# Altium PCB MQTT_SelService_V2.PcbDoc
Units mil, origin at the board's own origin, x right, y up, seen from the top; angles counter-clockwise.
Board outline 4825 x 3045 mil, 2 copper layers (Top Layer, Bottom Layer); 115 components, 94 nets, 385 pads, 190 vias.
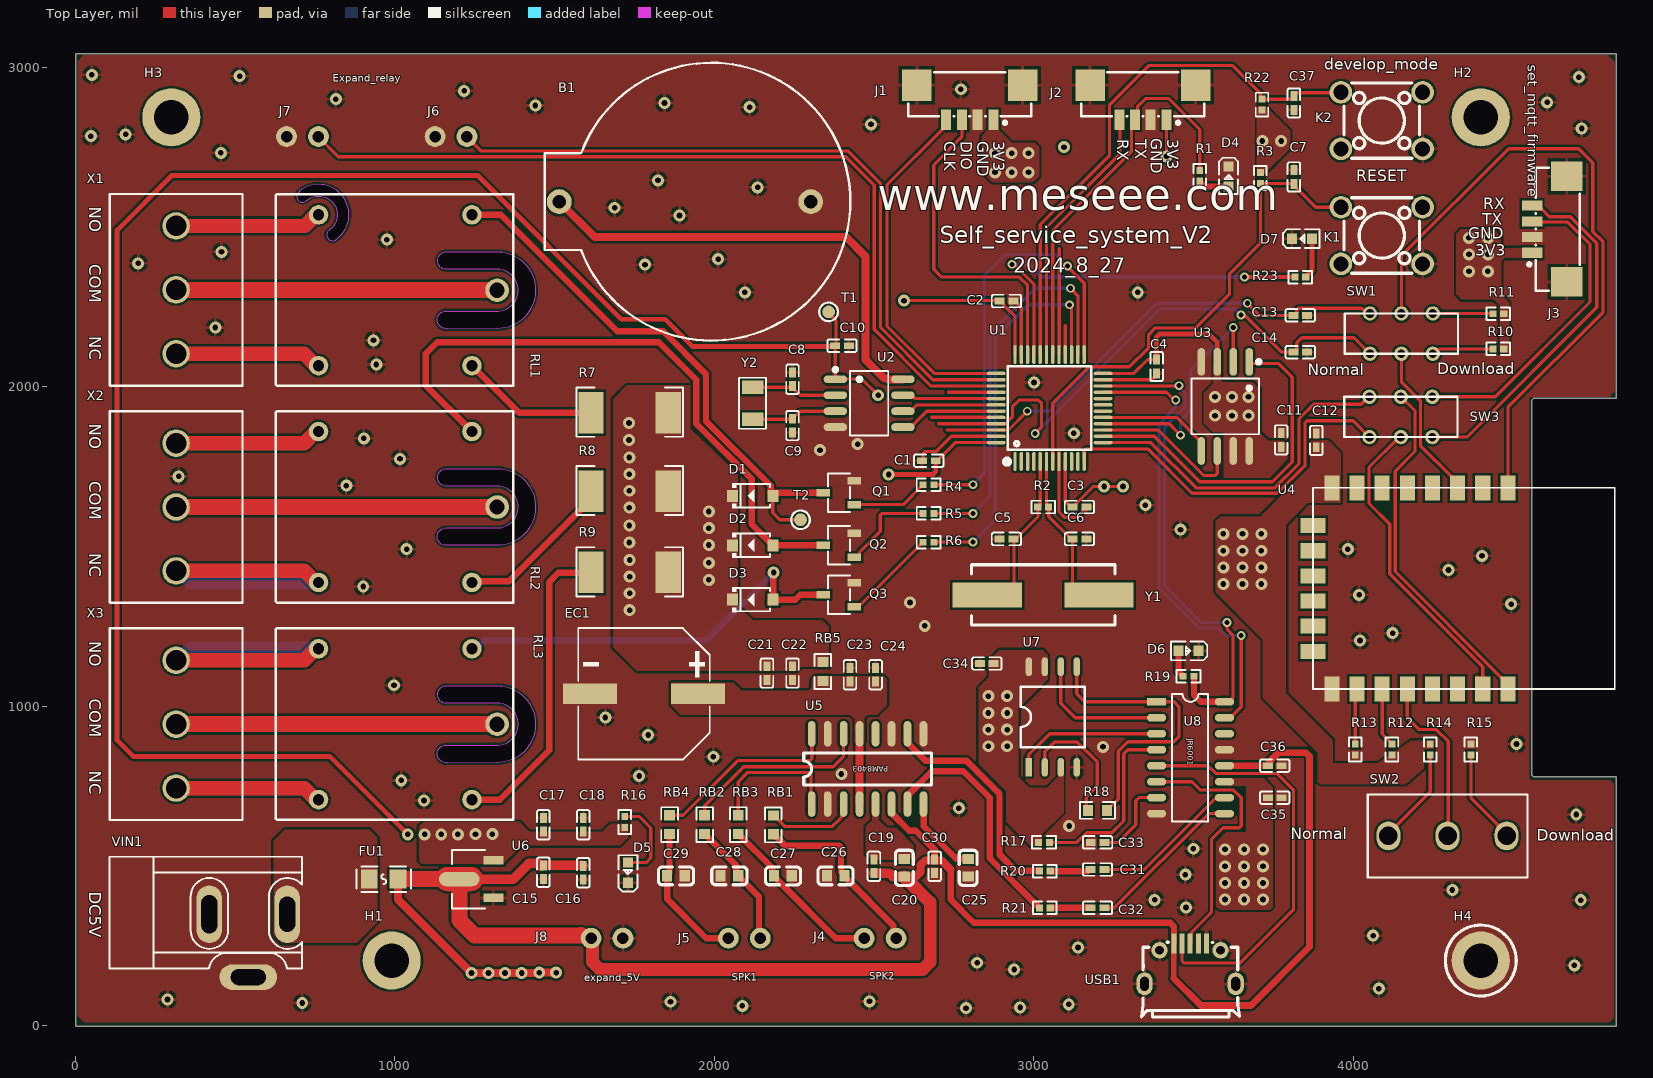
[diagram p0: Top Layer view]
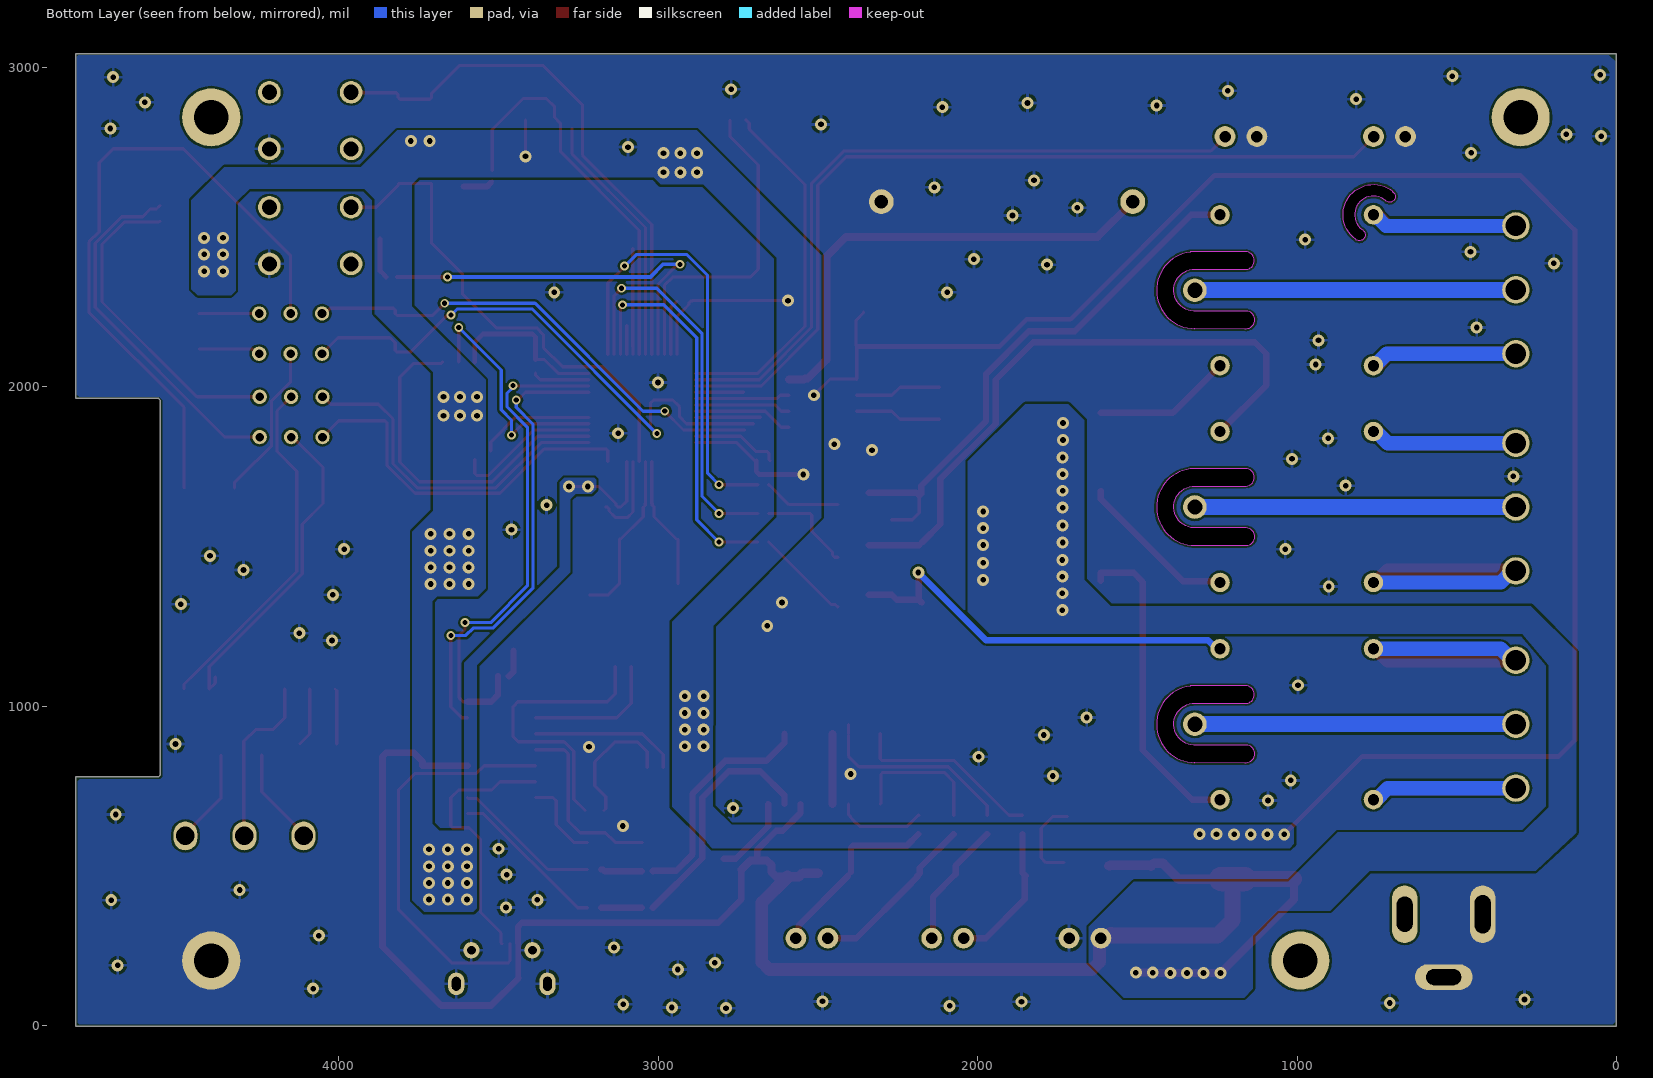
[diagram p1: Bottom Layer view, seen from below]

## Layer stack, top to bottom
Top Solder: solder mask 0.4, Solder Resist, Dk 3.5
Top Layer: signal copper 1.4
Dielectric 1: dielectric 12.6, FR-4, Dk 4.8
Bottom Layer: signal copper 1.4
Bottom Solder: solder mask 0.4, Solder Resist, Dk 3.5

## Board outline
0,-1 0,3044 4825,3044 4825,1964 4565,1964 4560,1959 4560,784 4565,779 4825,779 4825,-1
cut-out: 816.73,2461.83 ccw(c761,2539) 700.67,2612.63 701.55,2611.55 ccw(c710,2596) 722.6,2583.57 cw(c761,2539) 797.99,2493.25 798.07,2493.04 ccw(c805,2476)
cut-out: 1163.23,823.77 cw(c1160,851) 1158.99,878.4 1159.19,878.42 1314.96,878.42 ccw(c1320.06,944) 1319.99,1009.77 1164.23,1009.77 cw(c1161,1037) 1159.99,1064.4 1159.99,1064 1335,1064 1334.91,1063.29 cw(c1320.06,944) 1320,823.79 1320,824.2
cut-out: 1163.23,2182.55 cw(c1160,2209.78) 1158.99,2237.18 1159.19,2237.2 1314.96,2237.2 ccw(c1320.06,2302.78) 1319.99,2368.55 1164.23,2368.55 cw(c1161,2395.78) 1159.99,2423.18 1159.99,2422.78 1335,2422.78 1334.91,2422.07 cw(c1320.06,2302.78) 1320,2182.57 1320,2182.98
cut-out: 1163.23,1503.77 cw(c1160,1531) 1158.99,1558.4 1159.19,1558.42 1314.96,1558.42 ccw(c1320.06,1624) 1319.99,1689.77 1164.23,1689.77 cw(c1161,1717) 1159.99,1744.4 1159.99,1744 1335,1744 1334.91,1743.29 cw(c1320.06,1624) 1320,1503.79 1320,1504.2

## Design rules (kind name [scope] priority, off if disabled: settings)
Clearance [All] p1: gap=7 ignorepadtopadclearanceinfootprint=FALSE except(0: Arc-Hole Track-Hole SMDPad-Hole THPad-Hole Via-Hole Fill-Hole Poly-Hole Region-Hole Text-Hole)
PolygonConnect [All] p1: connectstyle=Relief reliefconductorwidth=10 reliefentries=4 polygonreliefangle="90 Angle" airgapwidth=10
RoutingVias [All] p1: holewidth=28 width=50 viastyle="Through Hole" minholewidth=28 minwidth=50 maxholewidth=28 maxwidth=50
SolderMaskExpansion [All] p1: expansion=4 istentingtop=FALSE
Width [All] p1: maxlimit=60 minlimit=10 preferedwidth=10 minimp=50.000000 maximp=50.000000 favimp=50.000000
30 further rules are at their usual default settings.

## Components (designator, comment, footprint, x,y, rotation, side; value= is the part's Value field where it differs from the comment)
B1 "Battery" BATTERY 1991,2580 r180 top
C1 "104,0402" C0402 2672,1769 r0 top value=104
C2 "104,0402" C0402 2915,2269 r180 top value=104
C3 "104,0402" C0402 3143.54,1624 r180 top value=104
C4 "104,0402" C0402 3385,2064 r90 top value=104
C5 "20pF,0402" C0402 2915,1524 r0 top value=104
C6 "20pF,0402" C0402 3143.54,1524 r180 top value=104
C7 "104,0402" C0402 3815,2657.54 r270 top value=104
C8 "6pF,0402" C0402 2245,2024 r270 top value=104
C9 "6pF,0402" C0402 2245,1879 r90 top value=104
C10 "104,0402" C0402 2400,2129 r180 top value=104
C11 "104,0402" C0402 3775,1834 r270 top value=104
C12 "104,0402" C0402 3885,1832.54 r270 top value=104
C13 "104,0402" C0402 3835,2224 r180 top value=104
C14 "104,0402" C0402 3835,2109 r180 top value=104
C15 "104,0402" C0402 1465,480.46 r90 top value=104
C16 "2.2uF,0402" C0402 1590,479 r90 top value=104
C17 "104,0402" C0402 1465,629 r270 top value=104
C18 "2.2uF,0402" C0402 1590,629 r270 top value=104
C19 "47k,0402" C0402 2500,499 r270 top value=104
C20 "1nF,0603" C0603 2595,494 r270 top value=104
C21 "104,0402" C0402 2165,1104 r90 top value=104
C22 "106,0402" C0402 2245,1104 r90 top value=104
C23 "104,0402" C0402 2425,1099 r270 top value=104
C24 "104,0402" C0402 2505,1099 r270 top value=104
C25 "105,0603" C0603 2795,494.71 r90 top value=104
C26 "200pF,0603" C0603 2380,469 r0 top value=104
C27 "200pF,0603" C0603 2215,469 r180 top value=104
C28 "200pF,0603" C0603 2047.56,469 r0 top value=104
C29 "200pF,0603" C0603 1880,469 r180 top value=104
C30 "104,0402" C0402 2690,499 r90 top value=104
C31 "470nF,0402" C0402 3200,489 r180 top value=104
C32 "470nF,0402" C0402 3200,369 r0 top value=104
C33 "104,0402" C0402 3200.24,573.84 r180 top value=104
C34 "104,0402" C0402 2853.54,1134 r0 top value=104
C35 "104,0402" C0402 3755,714 r180 top value=104
C36 "104,0402" C0402 3755,814 r180 top value=104
C37 "104,0402" C0402 3815,2889 r90 top value=104
D1 "1N4148" 1N4148 2120,1659 r180 top
D2 "1N4148" 1N4148 2120,1504 r180 top
D3 "1N4148" 1N4148 2120,1334 r180 top
D4 "LED" LED0603 3610,2659 r270 top
D5 "LED" LED0603 1730,479 r90 top
D6 "LED" LED0603 3485,1174 r180 top
D7 "LED" LED0603 3840,2464 r0 top
EC1 "EC1000uF" EC1000uF 1780,1039 r180 top
FU1 "PPTC" F0805 965,459 r180 top
H1 "HOLE_M2.5" hole 990,204 r0 top
H2 "HOLE_M2.5" hole 4400,2844 r0 top
H3 "HOLE_M2.5" hole 300,2844 r0 top
H4 "HOLE_M2.5" hole 4400,204 r0 top
J1 "Conn_1.25mm_4Pin_PLT" CONN-SMD_4P-P1.25_HCTL_HC-1.25-4PLT 2800,2890.34 r180 top
J2 "Conn_1.25mm_4Pin_PLT_1" CONN-SMD_4P-P1.25_HCTL_HC-1.25-4PLT 3342,2890.34 r180 top
J3 "Conn_1.25mm_4Pin_PLT_2" CONN-SMD_4P-P1.25_HCTL_HC-1.25-4PLT 4615,2494 r90 top
J4 "Speaker-OUTL" XH_2.54MM_2PIN_直插 2520,274 r180 top
J5 "Speaker-OUTR" XH_2.54MM_2PIN_直插 2095,274 r180 top
J6 "Switch_light" XH_2.54MM_2PIN_直插 1175,2784 r0 top
J7 "Switch_light" XH_2.54MM_2PIN_直插 710,2784 r0 top
J8 "外接电源" XH_2.54MM_2PIN_直插 1665,274 r180 top
K1 "TS665CJ" SW-TH_4P-L6.0-W6.0-P4.50-LS6.5 4090,2474 r0 top
K2 "TS665CJ" SW-TH_4P-L6.0-W6.0-P4.50-LS6.5 4090,2834 r0 top
Q1 "S8050" S8050 2390,1669 r0 top
Q2 "S8050" S8050 2390,1504 r0 top
Q3 "S8050" S8050 2390,1349 r0 top
R1 "5.1k,0402" R0402 3520,2661.04 r90 top
R2 "1M,0402" R0402 3030,1624 r180 top
R3 "10k,0402" R0402 3710,2654 r90 top
R4 "1k,0402" R0402 2671.16,1693.84 r180 top
R5 "1k,0402" R0402 2671.16,1604 r180 top
R6 "1k,0402" R0402 2671.16,1514 r180 top
R7 "R36,2512" R2512 1735,1919 r0 top
R8 "R36,2512" R2512 1735,1674 r0 top
R9 "R36,2512" R2512 1735,1419 r0 top
R10 "10k,0402" R0402 4455,2119 r180 top
R11 "10k,0402" R0402 4455,2229 r180 top
R12 "10k,0402" R0402 4122,865 r270 top
R13 "10k,0402" R0402 4007,865 r90 top
R14 "10k,0402" R0402 4242,865 r90 top
R15 "10k,0402" R0402 4369,865 r90 top
R16 "5.1k,0402" R0402 1719.89,637.84 r90 top
R17 "22k,0402" R0402 3032.28,573.84 r180 top
R18 "R100,0603" R0603 3199.9,673.84 r180 top
R19 "470R,0402" R0402 3485,1094 r180 top
R20 "10k,0402" R0402 3035,484 r180 top
R21 "10k,0402" R0402 3035,368.84 r0 top
R22 "10k,0402" R0402 3715,2884 r270 top
R23 "10k,0402" R0402 3835,2344 r0 top
RB1 "FB_47R,0603" R0603 2185,629 r90 top
RB2 "FB_47R,0603" R0603 1970,629.34 r270 top
RB3 "FB_47R,0603" R0603 2075,629.34 r90 top
RB4 "FB_47R,0603" R0603 1860,629.34 r270 top
RB5 "FB_120,0603" R0603 2340,1108.66 r270 top
RL1 "RelayDC5V" RelayDC5V 1320.06,2302.78 r180 top
RL2 "RelayDC5V" RelayDC5V 1320.06,1624 r180 top
RL3 "RelayDC5V" RelayDC5V 1320.06,944 r180 top
SW1 "ESP8266_switch_RST_EN" switch_TX_RX_toDownload 4151.58,2104 r0 top
SW2 "ESP8266_switch_GPIO0" switch_GPIO0_ESP 4296,594 r180 top
SW3 "ESP8266_switch_R_T" switch_TX_RX_toDownload 4150,1843.02 r0 top
T1 "TP_PWR" TP_PWR 2358,2235 r0 top
T2 "TP_PWR" TP_PWR 2270,1584 r0 top
U1 "STM32F103C8T6" LQFP-48_L7.0-W7.0-P0.50-LS9.0-BL 3050,1934 r0 top
U2 "DS1302" DS1302 2485,1949 r270 top
U3 "W25Q64" W25Q64 3600,1939 r180 top
U4 "ESP12F" ESP-12E 3874.76,1684 r270 top
U5 "PAM8403" SO-16 2305,694 r90 top
U6 "MD7612" MD71612A 1255,459 r0 top
U7 "W25QXX" W25Qxx -27408,22696 r90 top
U8 "JR6001" JR6001 25921,31243 r0 top
USB1 "USB-5PIN" MICRO-USB-SMD_MICROXNJ 3490,194 r0 top
VIN1 "DC5V" DC5V 244.05,179 r0 top
X1 "Relay_Pin3" Relay_Pin3_X 315,2304 r180 top
X2 "Relay_Pin3" Relay_Pin3_X 315,1624 r180 top
X3 "Relay_Pin3" Relay_Pin3_X 315,944 r180 top
Y1 "8MHz" 8MHz 3030,1349 r180 top
Y2 "32.768kHz" 32768Hz 2120,1949 r270 top

## Footprints (in the part's own frame and the unit in brackets; to place one, negate y for a bottom-side part, rotate by r counter-clockwise, add the part's x,y. Pads: shape width x height; smd on the part's side, far side on the other; paste and mask are expansions set on the pad)
1N4148 [mm]
  rect 0.88x0.96 smd: 1(1.61,0) 2(-1.61,0)
  silkscreen extent -1.38,-1 1.6,1
8MHz [mm] "with Master"
  rect 5.5x2 smd: 1(-4.45,0) 2(4.45,0)
  silkscreen extent -5.7,-2.4 5.7,2.4
32768Hz [mm] "withDS1302"
  rect 1.05x1.7 smd: 1(-1.275,0) 2(1.275,0)
  silkscreen extent -2.03,-1.08 2.03,1.08
BATTERY [mil] "VCC_Backup"
  round 78 hole 43: 1(476.37,0) 2(-311,0)
  silkscreen extent -435,-435 522,435
C0402 [mm]
  rect 0.79x0.54 smd paste-100 mask+0.051: 1(-0.545,0) 2(0.545,0)
  silkscreen extent -1.17,-0.5 1.17,0.5
C0603 [mm]
  rect 0.8x0.9 smd: 1(-0.7,0) 2(0.7,0)
  silkscreen extent -1.41,-0.71 1.39,0.72
CONN-SMD_4P-P1.25_HCTL_HC-1.25-4PLT [mm]
  rect 0.8x1.62 smd paste+0 mask+0.05: 1(-1.875,1.38) 2(-0.625,1.38) 3(0.625,1.38) 4(1.875,1.38)
  rect 2.35x2.5 smd paste+0 mask+0.05: 5(-4.2,-1.38) 6(4.2,-1.38)
  silkscreen extent -4.9,-2.4 4.9,1.73
DC5V [mil]
  oval 80x180 hole 50 slot 110 at 90 deg: 1(419.09,170)
  oval 80x180 hole 50 slot 120 at 90 deg: 2(175,170)
  oval 180x80 hole 50 slot 110 at 0 deg: 3(297.05,-26.85)
  silkscreen extent -138,0 465,350
DS1302 [mm] "SOP-8"
  oval 0.63x1.865 smd: 1(-1.905,-2.683) 2(-0.635,-2.683) 3(0.635,-2.683) 4(1.905,-2.683) 5(1.905,2.682) 6(0.635,2.682) 7(-0.635,2.682) 8(-1.905,2.682)
  silkscreen extent -2.82,-2.83 2.58,1.52
EC1000uF [mm]
  rect 4.3x1.65 smd: 1(-4.3,0) 2(4.3,0)
  silkscreen extent -5.23,-5.23 5.23,5.23
ESP-12E [mm]
  rect 2x1.2 smd: 1(0,15.5) 2(0,13.5) 3(0,11.5) 4(0,9.5) 5(0,7.5) 6(0,5.5) 7(0,3.5) 8(0,1.5) 15(16,1.5) 16(16,3.5) 17(16,5.5) 18(16,7.5) 19(16,9.5) 20(16,11.5) 21(16,13.5) 22(16,15.5)
  rect 1.2x2 smd: 9(3,0) 10(5,0) 11(7,0) 12(9,0) 13(11,0) 14(13,0)
  silkscreen extent 0,0 16,24
F0805 [mm]
  rect 1.335x1.5 smd paste-100 mask+0.051: 1(-1.142,0) 2(1.142,0)
  silkscreen extent -2.16,-1.02 2.16,1.02
hole [mil] "m2.5"
  round 182 hole 108: 1(0,0)
JR6001 [mil]
  rect 60x24 smd: 1(-22536,-30229)
  oval 60x24 smd: 2(-22536,-30279) 3(-22536,-30329) 4(-22536,-30379) 5(-22536,-30429) 6(-22536,-30479) 7(-22536,-30529) 8(-22536,-30579) 9(-22323.4,-30579) 10(-22323.4,-30529) 11(-22323.4,-30479) 12(-22323.4,-30429) 13(-22323.4,-30379) 14(-22323.4,-30329) 15(-22323.4,-30279) 16(-22323.4,-30229)
  silkscreen extent -22487,-30604 -22375,-30204
LED0603 [mm]
  rect 0.8x0.8 smd: 1(0.799,0) 2(-0.799,0)
  silkscreen extent -1.49,-0.75 1.39,0.76
LQFP-48_L7.0-W7.0-P0.50-LS9.0-BL [mm]
  oval 0.27x1.5 smd paste+0 mask+0.05: 1(-2.75,-4.25) 2(-2.25,-4.25) 3(-1.75,-4.25) 4(-1.25,-4.25) 5(-0.75,-4.25) 6(-0.25,-4.25) 7(0.25,-4.25) 8(0.75,-4.25) 9(1.25,-4.25) 10(1.75,-4.25) 11(2.25,-4.25) 12(2.75,-4.25) 25(2.75,4.25) 26(2.25,4.25) 27(1.75,4.25) 28(1.25,4.25) 29(0.75,4.25) 30(0.25,4.25) 31(-0.25,4.25) 32(-0.75,4.25) 33(-1.25,4.25) 34(-1.75,4.25) 35(-2.25,4.25) 36(-2.75,4.25)
  oval 1.5x0.27 smd paste+0 mask+0.05: 13(4.25,-2.75) 14(4.25,-2.25) 15(4.25,-1.75) 16(4.25,-1.25) 17(4.25,-0.75) 18(4.25,-0.25) 19(4.25,0.25) 20(4.25,0.75) 21(4.25,1.25) 22(4.25,1.75) 23(4.25,2.25) 24(4.25,2.75) 37(-4.25,2.75) 38(-4.25,2.25) 39(-4.25,1.75) 40(-4.25,1.25) 41(-4.25,0.75) 42(-4.25,0.25) 43(-4.25,-0.25) 44(-4.25,-0.75) 45(-4.25,-1.25) 46(-4.25,-1.75) 47(-4.25,-2.25) 48(-4.25,-2.75)
  silkscreen extent -3.59,-4.46 3.3,3.34
MD71612A [mm] "SOT-89"
  rect 1.575x0.672 smd: 1(1.356,-1.5) 3(1.356,1.5)
  oval 3.226x1.14 smd: 2(-1.356,0)
  Top Layer region: -2.283,0.95 -0.429,0.95 -0.384,0.949 -0.34,0.946 -0.296,0.94 -0.252,0.933 -0.208,0.924 -0.165,0.912 -0.123,0.899 -0.081,0.884 -0.04,0.866 0,0.847 0.04,0.826 0.078,0.803 0.115,0.779 0.151,0.752 0.185,0.724 0.219,0.695 0.251,0.664 0.281,0.631 0.31,0.597 0.337,0.562 0.362,0.525 0.386,0.488 0.408,0.449 0.428,0.409 0.447,0.33 2.144,0.33 2.144,-0.33 0.447,-0.33 0.428,-0.409 0.408,-0.449 0.386,-0.488 0.362,-0.526 0.337,-0.562 0.31,-0.597 0.281,-0.631 0.251,-0.664 0.219,-0.695 0.185,-0.725 0.151,-0.753 0.115,-0.779 0.078,-0.804 0.04,-0.827 0,-0.848 -0.04,-0.867 -0.081,-0.884 -0.123,-0.899 -0.165,-0.913 -0.208,-0.924 -0.252,-0.934 -0.296,-0.941 -0.34,-0.946 -0.384,-0.949 -0.429,-0.95 -2.283,-0.95 -2.328,-0.949 -2.372,-0.946 -2.416,-0.941 -2.46,-0.934 -2.504,-0.924 -2.547,-0.913 -2.589,-0.899 -2.631,-0.884 -2.672,-0.867 -2.713,-0.848 -2.752,-0.827 -2.79,-0.804 -2.827,-0.779 -2.863,-0.753 -2.898,-0.725 -2.931,-0.695 -2.963,-0.664 -2.993,-0.631 -3.022,-0.597 -3.049,-0.562 -3.075,-0.526 -3.098,-0.488 -3.12,-0.449 -3.141,-0.409 -3.159,-0.369 -3.175,-0.327 -3.189,-0.285 -3.202,-0.242 -3.212,-0.199 -3.22,-0.155 -3.227,-0.111 -3.231,-0.067 -3.233,-0.022 -3.233,0.022 -3.231,0.067 -3.227,0.111 -3.22,0.155 -3.212,0.199 -3.202,0.242 -3.189,0.285 -3.175,0.327 -3.159,0.369 -3.141,0.409 -3.12,0.449 -3.098,0.488 -3.075,0.525 -3.049,0.562 -3.022,0.597 -2.993,0.631 -2.963,0.664 -2.931,0.695 -2.898,0.724 -2.863,0.752 -2.827,0.779 -2.79,0.803 -2.752,0.826 -2.713,0.847 -2.672,0.866 -2.631,0.884 -2.589,0.899 -2.547,0.912 -2.504,0.924 -2.46,0.933 -2.416,0.94 -2.372,0.946 -2.328,0.949 -2.283,0.95
  silkscreen extent -1.95,-2.33 0.7,2.33
MICRO-USB-SMD_MICROXNJ [mm] "withPWR"
  rect 0.4x1.6 smd paste-100 mask+0.051: 1(-1.3,1.596) 2(-0.65,1.596) 3(0,1.596) 4(0.65,1.596) 5(1.3,1.596)
  round 1.3 hole 0.7: 6(2.425,1.074) 9(-2.425,1.074)
  oval 1.3x1.8 hole 0.7 slot 1.1 at 90 deg: 7(3.625,-1.596) 8(-3.625,-1.596)
  silkscreen extent -3.87,-4.24 3.93,1.71
R0402 [mm]
  rect 0.566x0.54 smd paste-100 mask+0.051: 1(-0.433,0) 2(0.433,0)
  silkscreen extent -0.94,-0.5 0.94,0.5
R0603 [mil]
  rect 31.75x34.02 smd paste-3937.01 mask+2: 1(-29.66,0) 2(29.66,0)
  silkscreen extent -55,-26 55,26
R2512 [mm] "R2512,36ou"
  rect 2x3.3 smd: 1(-3.066,0) 2(3.066,0)
  silkscreen extent -4.23,-1.91 4.23,2.01
Relay_Pin3_X [mil]
  round 86 hole 64: 1(0,200) 2(0,0) 3(0,-200)
  silkscreen extent -208,-300 208,300
RelayDC5V [mm] "RelayDC5V"
  round 1.549 hole 0.9: 1(2,6) 3(2,-6) 4(14.2,6) 5(14.2,-6)
  round 1.88 hole 1.205: 2(0,0)
  silkscreen extent -1.27,-7.62 17.6,7.6
S8050 [mm] "NPN"
  rect 1.07x0.6 smd: 1(1.235,-0.95) 2(1.235,0.95) 3(-1.235,0)
  silkscreen extent -0.88,-1.54 0.88,1.54
SO-16 [mil] "PAM8403"
  oval 80x24 smd: 1(0,0) 2(0,-50) 3(0,-100) 4(0,-150) 5(0,-200) 6(0,-250) 7(0,-300) 8(0,-350) 9(220,-350) 10(220,-300) 11(220,-250) 12(220,-200) 13(220,-150) 14(220,-100) 15(220,-50) 16(220,0)
  silkscreen extent 60,-375 160,25
SW-TH_4P-L6.0-W6.0-P4.50-LS6.5 [mm] "矩阵键盘"
  round 1.8 hole 1.2: 1(-3.25,2.25) 2(3.25,2.25) 3(-3.25,-2.25) 4(3.25,-2.25)
  silkscreen extent -3,-3 3,3
switch_GPIO0_ESP [mil]
  oval 75x90 hole 58: 1(0,0) 2(-185.04,0) 3(185.04,0)
  silkscreen extent -250,-130 250,130
switch_TX_RX_toDownload [mil]
  round 45 hole 27: 1(0,125.98) 2(0,0) 3(-98.43,125.98) 4(-98.43,0) 5(98.43,125.98) 6(98.43,0)
  silkscreen extent -177,0 177,126
TP_PWR [mil] "TP_PWR"
  round 40 smd paste+0: 1(0,0)
  silkscreen extent -29,-29 29,29
W25Q64 [mil] "SOP-8"
  oval 23.98x86.79 smd: 1(-75,-139.46) 2(-25,-139.46) 3(25,-139.46) 4(75,-139.46) 5(75,139.46) 6(25,139.46) 7(-25,139.46) 8(-75,139.46)
  silkscreen extent -111,-145 106,87
W25Qxx [mm] "withJR6001"
  rect 1.5x0.5 smd: 1(-555.93,-771.982)
  oval 1.5x0.5 smd: 2(-555.93,-773.252) 3(-555.93,-774.522) 4(-555.93,-775.792) 5(-547.93,-775.792) 6(-547.93,-774.522) 7(-547.93,-773.252) 8(-547.93,-771.982)
  silkscreen extent -554.34,-776.43 -549.53,-771.35
XH_2.54MM_2PIN_直插 [mil] "speaker"
  round 65 hole 36: 1(50.79,0) 2(-49.21,0)

## Part data
B1: "V_Backup"
C1 C2 C3 C4 C7 C10 C11 C12 C13 C14 C15 C17 C21 C23 C24 C30 C33 C34 C35 C36 C37: library part Cap1, LatestRevisionDate=17-Jul-2002, LatestRevisionNote="Re-released for DXP Platform.", Published=8-Jun-2000, Publisher="Altium Limited"
C5 C6: library part Cap0402_3, LatestRevisionDate=17-Jul-2002, LatestRevisionNote="Re-released for DXP Platform.", Published=8-Jun-2000, Publisher="Altium Limited"
C8 C9: library part Cap0402_2, LatestRevisionDate=17-Jul-2002, LatestRevisionNote="Re-released for DXP Platform.", Published=8-Jun-2000, Publisher="Altium Limited"
C16 C18: library part C2.2uF, LatestRevisionDate=17-Jul-2002, LatestRevisionNote="Re-released for DXP Platform.", Published=8-Jun-2000, Publisher="Altium Limited"
C19 C22: library part Cap1, "104,0402", LatestRevisionDate=17-Jul-2002, LatestRevisionNote="Re-released for DXP Platform.", Published=8-Jun-2000, Publisher="Altium Limited"
C20: library part C1nF, LatestRevisionDate=17-Jul-2002, LatestRevisionNote="Re-released for DXP Platform.", Published=8-Jun-2000, Publisher="Altium Limited"
C25: library part Cap2, LatestRevisionDate=17-Jul-2002, LatestRevisionNote="Re-released for DXP Platform.", Published=8-Jun-2000, Publisher="Altium Limited"
C26 C27 C28 C29: library part C200pF, LatestRevisionDate=17-Jul-2002, LatestRevisionNote="Re-released for DXP Platform.", Published=8-Jun-2000, Publisher="Altium Limited"
C31 C32: library part C470nF, LatestRevisionDate=17-Jul-2002, LatestRevisionNote="Re-released for DXP Platform.", Published=8-Jun-2000, Publisher="Altium Limited"
D1 D2 D3: "SOD-123"
EC1: library part EC, "1000uF"
J1: "SWD_Conn"
J2: "USART_Conn"
J3: "ESP_Downl_Conn"
J6 J7: "2.54mm,直插"
J8: "2.54mm"
K1 K2: "矩阵按键"
R1 R4 R5 R6 R16 R19: library part R10k, "10k,0402", LatestRevisionDate=17-Jul-2002, LatestRevisionNote="Re-released for DXP Platform.", Published=8-Jun-2000, Publisher="Altium Limited"
R2: library part R1M, LatestRevisionDate=17-Jul-2002, LatestRevisionNote="Re-released for DXP Platform.", Published=8-Jun-2000, Publisher="Altium Limited"
R3 R22: library part R1M, "10,0402", LatestRevisionDate=17-Jul-2002, LatestRevisionNote="Re-released for DXP Platform.", Published=8-Jun-2000, Publisher="Altium Limited"
R10 R11 R12 R13 R14 R15 R20 R21 R23: library part R10k, LatestRevisionDate=17-Jul-2002, LatestRevisionNote="Re-released for DXP Platform.", Published=8-Jun-2000, Publisher="Altium Limited"
R17: library part R22k, LatestRevisionDate=17-Jul-2002, LatestRevisionNote="Re-released for DXP Platform.", Published=8-Jun-2000, Publisher="Altium Limited"
R18: library part R100, "0603", LatestRevisionDate=17-Jul-2002, LatestRevisionNote="Re-released for DXP Platform.", Published=8-Jun-2000, Publisher="Altium Limited"
RB1 RB2 RB3 RB4: library part FB_47R, LatestRevisionDate=17-Jul-2002, LatestRevisionNote="Re-released for DXP Platform.", Published=8-Jun-2000, Publisher="Altium Limited"
RB5: library part FB_120, LatestRevisionDate=17-Jul-2002, LatestRevisionNote="Re-released for DXP Platform.", Published=8-Jun-2000, Publisher="Altium Limited"
U3: "withMaster"
U6: library part MD7612A33PA1, "SOT-89"
U7 USB1: "withJR6001"
R7 R8 R9: LatestRevisionDate=17-Jul-2002, LatestRevisionNote="Re-released for DXP Platform.", Published=8-Jun-2000, Publisher="Altium Limited"

## Via types
v1: diameter 37.4, hole 17.72, Top Layer to Bottom Layer, tented both sides, 172 vias
v2: diameter 27.56, hole 15.75, Top Layer to Bottom Layer, tented both sides, 18 vias

## Nets (pads, with @x,y where several pads share a name; then routed paths per layer and width w, separated by ;. In a path a pad name is that pad's centre, name@x,y a point inside that pad or via, vN(x,y) a via of type N, cw(c..) or ccw(c..) an arc to the next point about the centre after c; other vN are vias at no path point)
5VA: C23.2 C24.2 EC1.1 RB5.2 U5.4 U5.13 | length 220
  Top Layer w25: U5.4 U5.13
12F_EN_PB8: C14.2 SW1.4 U1.45 | length 1797.1
  Top Layer w10: 2703,1885 2703.21,1884.79 U1.45 2882.8,1884.91 2911.82,1884.91 2933.41,1906.5 2933.41,1937.41 2955,1959 3015,1959 3025,1949 3025,1874.7 3005,1854.7 v2(3005,1854) ; v2(3649,2225) 3652.36,2221.64 3664.36,2221.64 3777,2109 C14.2 3818.46,2109 3824.09,2114.63 3824.09,2138.09 3840,2154 4003.15,2154 SW1.4
  Bottom Layer w10: v2(3005,1854) 3395,2244 3630,2244 v2(3649,2225)
12F_RST_PB9: C13.2 SW1.3 U1.46 | length 1527
  Top Layer w10: 2729.1,1865.1 U1.46 2882.8,1865.22 2921.22,1865.22 v2(2980,1924) ; v2(3669,2262) 3707,2224 3818.46,2224 3824.09,2229.63 3824.09,2240.77 3829.95,2246.63 4027.03,2246.63 4043.68,2229.98 SW1.3
  Bottom Layer w10: v2(2980,1924) 3048,1924 3386,2262 v2(3669,2262)
12F_RX_PA2: SW3.4 U1.12 | length 1179.9
  Top Layer w10: U1.12 3158.27,1800.14 3164.13,1806 3357,1806 3496,1667 3762,1667 3850,1755 3850,1888.14 3855.86,1894 4000.59,1894 SW3.4
12F_TX_PA3: SW3.3 U1.13 | length 1093
  Top Layer w10: U1.13 3367.27,1825.73 3509,1684 3754.96,1684 3831,1760.04 3831,1900 3877,1946 4025.54,1946 4048.54,1969 SW3.3
DACL: C32.2 U8.9 | length 498.3
  Top Layer w10: C32.2 3252.86,369 3547.86,664 U8.9
DACR: C31.1 U8.10 | length 469.3
  Top Layer w10: C31.1 3346,489 3568.32,711.32 3594.92,711.32 U8.10
DS1302_DIO: U1.42 U2.6 | length 300.3
  Top Layer w10: U2.6 2614.92,1924 2634.76,1943.84 U1.42
DS1302_OSCIN: C8.2 U2.2 Y2.1 | length 269.8
  Top Layer w10: Y2.1 2243.42,1999.2 2268.62,1974 U2.2
DS1302_OSCOUT: C9.2 U2.3 Y2.2 | length 269.8
  Top Layer w10: Y2.2 2243.42,1898.8 2268.62,1924 U2.3
DS1302_RST: U1.43 U2.5 | length 312.9
  Top Layer w10: U2.5 2614.92,1874 2665.08,1924.16 U1.43
DS1302_SCLK: U1.41 U2.7 | length 296.4
  Top Layer w10: U2.7 2618.92,1974 2629.39,1963.53 U1.41
ESP12F_Downl_RXD: J3.4 SW3.6 | length 1134.8
  Top Layer w10: SW3.6 4357.02,1843.02 4763,2249 4763,2449.96 4679.96,2533 4615,2533 4590.93,2557.07 4571.42,2557.07 J3.4
ESP12F_Downl_TXD: J3.3 SW3.5 | length 1008.5
  Top Layer w10: SW3.5 4445,1969 4742,2266 4742,2446.92 4672.92,2516 4563.27,2516 J3.3
ESP12F_EN: SW1.2 U4.3 | length 493
  Top Layer w10: SW1.2 4151.58,2016.22 4211,1956.79 4211,1816 4308.63,1718.37 4308.9,1718.37 4327.52,1699.75 U4.3
ESP12F_GPIO0: SW2.1 U4.18 | length 551.2
  Top Layer w10: U4.18 4170.04,963.96 4207.02,926.98 4261.02,926.98 4298,890 4298,596 SW2.1 SW2.1@4292,598
ESP12F_RST: SW1.1 U4.1 | length 2091.9
  Top Layer w10: SW1.1 4151.58,2410.58 4487,2746 4707,2746 4750.5,2702.5 4750.5,2486.5 4783,2454 4783,2234 4485,1936 U4.1
ESP12F_RXD: SW3.2 U4.21 | length 1025.9
  Top Layer w10: SW3.2 4144.87,1843.02 4050,1748.14 4050,1635 4115,1570 4115,1414.96 4406.26,1123.7 U4.21 4387.64,1072.7 U4.21@4387.64,1091.36
ESP12F_TXD: SW3.1 U4.22 | length 1105.5
  Top Layer w10: SW3.1 4194,1925 4194,1798 4132,1736 4132,1422 4465.55,1088.45 4466.38,1088.45 4485,1069.83 U4.22
GND: B1.2 C1.1 C2.1 C3.1 C4.1 C5.1 C6.1 C7.1 C8.1 C9.1 C10.1 C11.1 C12.1 C13.1 C14.1 C15.1 C16.1 C17.1 C18.1 C21.1 C22.1 C23.1 C24.1 C25.1 C26.1 C27.1 C28.1 C29.1 C30.1 C33.2 C34.1 C35.1 C36.1 C37.1 D4.2 D5.2 D6.2 D7.2 EC1.2 H4.1 J1.2 J1.5 J1.6 J2.2 J2.5 J2.6 J3.2 J3.5 J3.6 J6.2 J7.2 J8.2 K1.4 K2.4 Q1.2 Q2.2 Q3.2 R13.1 R15.2 U1.8 U1.23 U1.35 U1.47 U2.4 U3.4 U4.15 U5.2 U5.9 U5.11 U5.15 U6.1 U7.4 U8.8 U8.13 USB1.5 USB1.6 USB1.7 USB1.8 USB1.9 VIN1.2 VIN1.3 | length 903.5
  Top Layer w10: C1.1 2654,1772.46 2654,1792.14 2659.86,1798 2695,1798 2742.42,1845.42 U1.47 ; C2.1@2941.38,2269 2961.42,2248.96 U1.35 ; U1.8 3079.53,1608.47 3097,1591 3134,1591 3154.45,1611.45 3154.45,1618.37 3160.08,1624 C3.1 ; U1.23 3369.96,2022.58 3385,2037.62 C4.1
  Top Layer w20: v1@2394.67,784.67 v1(2398,788)
  other v1: 2788,55 2958,57 2088,62 3110,67 710,71 1863,75 2486,76 288,82 4081,116 2939,176 4693,189 2823,197 3139,245 4063,282 3477,370 4713,393 3379,394 4311,425 3475,473 3500,554 3111,625 4699,661 2766,681 1091,705 1020,768 1765,782 1997,842 3217,873 4512,882 1793,910 1659,965 997,1066 4022,1206 4124,1229 2659,1252 4495,1320 2613,1325 4019,1349 901,1375 4299,1427 4404,1471 1037,1492 3984,1492 3460,1553 3350,1630 848,1691 323,1720 1016,1775 2331,1802 2449,1821 903,1839 3126,1855 3001,2014 942,2070 933,2146 438,2186 2096,2296 3326,2296 1783,2383 196,2387 2012,2400 457,2423 975,2461 1891,2537 1688,2561 2136,2625 1824,2647 455,2733 48,2785 157,2791 4716,2809 2491,2822 2111,2876 1440,2881 1844,2889 4608,2891 815,2901 1217,2927 2772,2932 4707,2970 514,2973 51,2977
JR6001_BUSY: R19.1 U1.22 U8.16 | length 1579.7
  Top Layer w10: U1.22 v2@3455,2002.9 ; U8.16 3611.81,1014 3621.74,1023.93 3621.74,1026.05 3624,1028.31 3624,1223 3605.35,1241.65 3605.35,1261.65 v2(3605,1262)
  Top Layer w20: R19.1 3502.04,1035.72 3523.76,1014 U8.16
  Bottom Layer w10: v2(3455,2004) 3455,1999.25 3474,1980.25 3474,1938 3410,1874 3410,1377 3525,1262 v2(3605,1262)
JR_SPI_SCK: U7.6 U8.2 | length 433.6
  Top Layer w10: U7.6 3085,1009 3130,964 U8.2
MUTE: C19.1 C20.1 U5.5
NetB1_1: B1.1 U2.8 | length 1495.5
  Top Layer w25: B1.1 1625.63,2469 2413,2469 2474,2408 2474,2085 2532.5,2026.5 2541.5,2026.5 2544,2024 U2.8
NetC26_2: C26.2 J4.2 RB1.1 | length 585.5
  Top Layer w10: RB1.1 RB1.1@2186.13,599.34 ; C26.2@2396.81,481.72 2409.53,469 C26.2@2410,469
  Top Layer w20: RB1.1@2186.13,599.34 2221.47,564 2390,564 2396.81,557.19 C26.2@2396.81,481.72 ; C26.2 2407.56,467.03 2561.18,313.42 2561.18,282.82 J4.2@2570,274
NetC27_2: C27.2 J4.1 RB3.1 | length 555.8
  Top Layer w10: C27.2@2176.69,477.31 C27.2@2185,469
  Top Layer w20: RB3.1 2076.13,599.68 2181.69,494.12 2181.69,476.72 2189.41,469 C27.2@2190,469 ; C27.2 2187.44,467.03 2207.33,447.14 2207.33,446.72 2380.05,274 J4.1@2470,274
NetC28_2: C28.2 J5.2 RB2.2 | length 398.5
  Top Layer w20: RB2.2 1971.13,599.68 2069.37,501.44 2069.37,474.63 C28.2@2075,469 ; C28.2 2140,404.12 2140,278.21 J5.2
NetC29_2: C29.2 J5.1 RB4.2 | length 452.9
  Top Layer w20: C29.2@1850,469 1850.47,469 1860,478.53 RB4.2 ; C29.2 1852.44,396.56 1975,274 2040,274 J5.1@2045,279
NetC31_2: C31.2 R20.1 | length 128.6
  Top Layer w20: R20.1 3168.62,484 3173.62,489 C31.2
NetC32_1: C32.1 R21.2 | length 126.6
  Top Layer w20: R21.2 3052.12,368.92 3178.46,368.92 C32.1
NetC33_1: C33.1 U8.7 | length 265.3
  Top Layer w10: C33.1 3264.84,573.84 3320,629 3320,704 3330,714 U8.7
NetD4_1: D4.1 R1.1 | length 97.1
  Top Layer w10: R1.1 3520,2643.49 3525.63,2637.86 R1.1@3526.14,2637.86
  Top Layer w20: R1.1@3526.14,2637.86 3536.48,2627.52 D4.1
NetD5_1: D5.1 R16.2 | length 267
  Top Layer w10: R16.2 1765.12,654.88 1801,619 1801,525 1786.47,510.47 D5.1
NetD6_1: D6.1 R19.2 | length 86.3
  Top Layer w20: D6.1 3453.53,1107.93 3467.46,1094 R19.2
NetD7_1: D7.1 R23.2 | length 128.3
  Top Layer w15: R23.2 3852.54,2344 3855.67,2347.13 3855.67,2347.64 3871.47,2363.43 D7.1
NetFU1_2: FU1.2 VIN1.1
NetQ1_1: Q1.1 R4.2 | length 241.3
  Top Layer w10: Q1.1 2591.37,1631.6 2653.62,1693.84 R4.2
NetQ2_1: Q2.1 R5.2 | length 307.2
  Top Layer w10: Q2.1 2447.88,1466.6 2454.69,1473.41 2454.69,1482.66 2520,1547.97 2520,1598.14 2525.86,1604 R5.2
NetQ3_1: Q3.1 R6.2 | length 299.3
  Top Layer w10: Q3.1 2445.44,1318.41 2458.03,1318.41 2653.62,1514 R6.2
NetR10_2: R10.2 SW1.6 | length 194.2
  Top Layer w10: SW1.6 4258.36,2104 4273.36,2119 R10.2
NetR11_2: R11.2 SW1.5 | length 188.4
  Top Layer w10: SW1.5 4250.49,2229.49 4437.47,2229.49 R11.2
NetR12_1: R12.1 U4.17 | length 184.8
  Top Layer w10: U4.17 4091.3,913.25 4122,882.55 R12.1
NetR13_2: R13.2 U4.16 | length 174.3
  Top Layer w10: R13.2 4007,1048.52 U4.16
NetR14_1: R14.1 SW2.3 | length 308.2
  Top Layer w10: SW2.3 4110.96,601.5 4242,732.54 R14.1
NetR15_1: R15.1 SW2.2 | length 338.5
  Top Layer w10: R15.1 4369,713.54 4481.04,601.5 SW2.2 4476.04,599 SW2.2@4445,599
NetR17_1: R17.1 U8.4 | length 578.9
  Top Layer w10: R17.1 3135.62,573.84 3165.7,603.92 3244.92,603.92 3282,641 3282,851 3295,864 U8.4
NetR18_1: R18.1 U7.5 U8.1 | length 924.5
  Top Layer w10: U7.5 3135,1039 3160,1014 U8.1 3440,1014 3455,999 3455,904.86 3439.14,889 3295,889 3265,859 3265,709.29 R18.1
NetR18_2: R18.2 U7.2 | length 419.5
  Top Layer w10: U7.2 3035,858 3065,888 3137,888 3199,826 3199,751 3165,717 3165,679.08 R18.2
NetR20_2: R20.2 U5.10 | length 719
  Top Layer w20: U5.10 2605,886 2662,829 2790.47,829 2893,726.47 2893,536 2944.37,484.63 3017.33,484.63 R20.2
NetR21_1: R21.1 U5.7 | length 760.5
  Top Layer w20: U5.7 2605,720.92 2681.08,797 2780,797 2863,714 2863,523.8 3016.83,369.98 3016.83,369.47 3017.46,368.84 R21.1
NetRB1_2: RB1.2 U5.3 | length 283.9
  Top Layer w10: RB1.2 2186.13,658.66 2220.79,624 2370,624 2386.16,640.16 2399.41,653.41 2399.41,656.62 2405,662.21 U5.3
NetRB2_1: RB2.1 U5.14 | length 622.2
  Top Layer w10: RB2.1 1970,689 2092,811 2372,811 2405,844 U5.14@2405,909 ; U5.14 U5.14@2405,942
NetRB3_2: RB3.2 U5.1 | length 440.8
  Top Layer w10: RB3.2 2075,763 2105,793 2297.14,793 2303,787.14 2303,696 U5.1
NetRB4_1: RB4.1 U5.16 | length 596.4
  Top Layer w10: RB4.1 1902,659 2073,830 2299.14,830 2305,835.86 U5.16
NetRL1_4: RL1.4 X1.1 | length 923
  Top Layer w30: RL1.4@752.61,2066.56 RL1.4
  Top Layer w45: X1.1 715.17,2104 RL1.4@752.61,2066.56
  Bottom Layer w45: X1.1 719.23,2104 756.67,2066.56 RL1.4
NetRL1_5: RL1.5 X1.3 | length 921
  Top Layer w30: RL1.5@752.61,2539 RL1.5
  Top Layer w45: X1.3 717.61,2504 RL1.5@752.61,2539
  Bottom Layer w45: X1.3 721.67,2504 756.67,2539 RL1.5
NetRL2_4: RL2.4 X2.1 | length 922
  Top Layer w30: RL2.4@752.61,1387.78 RL2.4
  Top Layer w45: X2.1 716.39,1424 RL2.4@752.61,1387.78
  Bottom Layer w45: X2.1 326.09,1424 362.32,1387.78 RL2.4
NetRL2_5: RL2.5 X2.3 | length 922
  Top Layer w30: RL2.5@752.61,1860.22 RL2.5
  Top Layer w45: X2.3 716.39,1824 RL2.5@752.61,1860.22
  Bottom Layer w30: RL2.5@752.61,1860.22 RL2.5
  Bottom Layer w45: X2.3 716.39,1824 RL2.5@752.61,1860.22
NetRL3_4: RL3.4 X3.1 | length 922
  Top Layer w30: RL3.4@752.61,707.78 RL3.4
  Top Layer w45: X3.1 716.39,744 RL3.4@752.61,707.78
  Bottom Layer w30: RL3.4@752.61,707.78 RL3.4
  Bottom Layer w45: X3.1 716.39,744 RL3.4@752.61,707.78
NetRL3_5: RL3.5 X3.3 | length 940.2
  Top Layer w30: RL3.5@752.61,1180.22 RL3.5
  Top Layer w45: X3.3 716.39,1144 RL3.5@752.61,1180.22
  Bottom Layer w30: RL3.5@745.29,1174.29 755.07,1174.29 RL3.5
  Bottom Layer w45: X3.3 326.09,1144 362.32,1180.22 RL3.5
NetU7_1: U7.1 U8.3 | length 466.9
  Top Layer w10: U7.1 2985,849 3050,914 U8.3
NRST: C7.2 K1.1 R3.1 U1.7 | length 1573.5
  Top Layer w10: U1.7 3059.84,1948.84 3174,2063 3300,2063 3360,2123 3360,2164 3381,2185 3508,2185 3613,2290 3613,2353 3710,2450 R3.1 3814.12,2636.96 3814.12,2632.04 3883.58,2562.58 K1.1@3962.05,2562.58
OSCIN: C5.2 R2.2 U1.5 Y1.2 | length 415.6
  Top Layer w10: Y1.2@2938.55,1383.37 C5.2@2938.55,1524 ; C5.2@2943.47,1524 3013.59,1594.12 3013.59,1623.37 R2.2 ; R2.2@3013.37,1624 3013.46,1624 3019.09,1629.63 3019.09,1634.11 3020.47,1635.49 U1.5
OSCOUT: C6.2 R2.1 U1.6 Y1.1 | length 527.6
  Top Layer w10: U1.6 3040.16,1635.49 3040.91,1634.74 3040.91,1629.63 3046.54,1624 R2.1 3047.04,1594.12 3117.16,1524 C6.2 3122.08,1383.37 3156.45,1349 Y1.1@3215,1349
PA11: C37.2 K2.1 R22.1 U1.32 | length 1712.5
  Top Layer w10: U1.32 3020.47,2508.47 3238,2726 3238,2884 3360,3006 3623,3006 3709.99,2919.01 3709.99,2906.05 R22.1 3809.37,2901.04 3815,2906.67 C37.2 3815,2915.38 3820.63,2921.01 3960.49,2921.01 K2.1
PA12: R23.1 U1.33 | length 1217.8
  Top Layer w10: v2(2932.02,2384) 2939.04,2384 3000.79,2322.25 U1.33
  Top Layer w12: v2(3660,2344) R23.1
  Bottom Layer w12: v2(2932.02,2384) 2985,2384 3025,2344 v2(3660,2344)
PA15: J6.1 U1.38 | length 2237.5
  Top Layer w10: J6.1@1224.21,2784 1269.21,2739 2418.04,2739 2521,2636.04 2521,2186 2684.42,2022.58 U1.38
PB3: J7.1 U1.39 | length 2711.8
  Top Layer w10: J7.1@759.21,2784 822.21,2721 2412,2721 2501,2632 2501,2180 2678.1,2002.9 U1.39
PB12: R4.1 U1.25 | length 1393.2
  Top Layer w10: R4.1 2688.28,1693.92 2809.92,1693.92 v2(2810,1694) ; v2(3105.78,2379) 3105.78,2377.22 3158.27,2324.73 U1.25
  Bottom Layer w10: v2(2810,1694) 2846,1730 2846,2349 2912,2415 3068,2415 3104,2379 v2(3105.78,2379)
PB13: R5.1 U1.26 | length 1235
  Top Layer w10: R5.1 v2(2810,1604) ; v2(3115,2309) 3138.58,2285.42 U1.26
  Bottom Layer w10: v2(2810,1604) 2863,1657 2863,2167 3005,2309 v2(3115,2309)
PB14: R6.1 U1.27 | length 1224
  Top Layer w10: R6.1 v2(2810,1514) ; v2(3111.95,2257.05) 3118.9,2250.1 U1.27
  Bottom Layer w10: v2(2810,1514) 2880,1584 2880,2154 2983.05,2257.05 v2(3111.95,2257.05)
Relay_COM_1: RL1.2 X1.2 | length 2011.1
  Top Layer w50: X1.2 315.61,2303.39 1319.45,2303.39 RL1.2
  Bottom Layer w50: X1.2 315.61,2303.39 1319.45,2303.39 RL1.2
Relay_COM_2: RL2.2 X2.2 | length 2007.7
  Top Layer w50: X2.2 RL2.2@1318.84,1624
  Bottom Layer w50: X2.2 RL2.2@1318.84,1624
Relay_COM_3: RL3.2 X3.2 | length 2007.7
  Top Layer w50: X3.2 RL3.2@1318.84,944
  Bottom Layer w50: X3.2 RL3.2@1318.84,944
Relay_DC-_1: D1.2 Q1.3 RL1.3 T2.1 | length 1705.6
  Top Layer w10: D1.2 2183.39,1605.61 2205,1584 T2.1
  Top Layer w20: RL1.3 1331,2539 1696,2174 1840,2174 1974,2040 1974,1893 2176.37,1690.63 2176.37,1666.02 D1.2 ; D1.2@2191.82,1669 Q1.3
Relay_DC-_2: D2.2 Q2.3 RL2.3 | length 1978.8
  Top Layer w15: D2.2@2183.2,1503.8 D2.2
  Top Layer w20: RL2.3 1097,2004.54 1097,2104 1133,2140 1826,2140 1944,2022 1944,1884.82 2117,1711.82 2117,1570.39 2174.49,1512.9 D2.2@2176.07,1512.9 ; D2.2 Q2.3
Relay_DC-_3: D3.2 Q3.3 RL3.3 | length 1306.1
  Top Layer w20: D3.2@2174.49,1325.1 2176.07,1325.1 2184.7,1333.73 D3.2@2184.7,1334 ; v1(2186,1419) 2184.7,1417.7 D3.2@2184.7,1334 ; Q3.3 2268.92,1349 2253.92,1334 D3.2@2184.7,1334
  Bottom Layer w20: RL3.3 1252.41,1180.22 1279.19,1207 1974,1207 v1(2186,1419)
Relay_EN_1: R7.1 RL1.1 | length 434.1
  Top Layer w20: RL1.1 1388.87,1919 R7.1
Relay_EN_2: R8.1 RL2.1 | length 506.5
  Top Layer w20: RL2.1 1244.54,1391 1356.87,1391 1614.28,1648.41 R8.1
Relay_EN_3: R9.1 RL3.1 | length 1001.9
  Top Layer w20: RL3.1 1328.78,707.78 1483,862 1483,1101.28 1483,1389 1512,1418 1613.28,1418 R9.1 R9.1@1614.28,1393.41
SWD_CLK: J1.4 U1.37 | length 1125.6
  Top Layer w10: J1.4 2715.44,2825.26 2715.44,2807.44 2541,2633 2541,2190.04 2688.77,2042.27 U1.37
SWD_DIO: J1.3 U1.34 | length 1035.5
  Top Layer w10: J1.3 2775.4,2819.87 2775.4,2783.4 2687,2695 2687,2369 2712,2344 2955,2344 2981.1,2317.9 U1.34
USART1_RX: J2.4 U1.31 | length 802.9
  Top Layer w10: U1.31 3040.16,2499.16 3270,2729 J2.4@3270,2809
USART1_TX: J2.3 R1.2 U1.30 | length 1259.4
  Top Layer w10: U1.30 3059.84,2489.84 3306,2736 3306,2803.26 3306.65,2803.91 3306.65,2825.26 3325.04,2843.66 3325.04,2877.04 3351,2903 3423,2903 3520,2806 R1.2
USART3_TX: U1.21 U8.15 | length 1456.5
  Top Layer w10: U1.21 3416.04,1983.21 3440.25,1959 v2(3445,1959) ; U8.15 3615.6,964 3649.78,998.18 v2(3649.78,1222)
  Bottom Layer w10: v2(3445,1959) 3445,1936 3393,1884 3393,1369.96 3517.96,1245 3580,1245 3603,1222 v2(3649.78,1222)
USB_DM: U8.5 USB1.2 | length 1310.1
  Top Layer w10: U8.5 3545.66,814 3569.66,790 3761,790 3814,737 3814,364 3646,196 3471,196 3464.41,202.59 USB1.2
USB_DP: U8.6 USB1.3 | length 839
  Top Layer w10: U8.6 3495.73,764 3521.73,738 3625.54,738 3650.13,713.41 3650.13,625.86 3644.27,620 3593,620 3557,584 3557,354.6 3492.87,290.48 3492.87,259.73 USB1.3
VCC_3V3: C1.2 C2.2 C3.2 C4.2 C10.2 C11.2 C12.2 C17.2 C18.2 C34.2 C35.2 J1.1 J2.1 J3.1 R3.2 R10.1 R11.1 R12.2 R14.2 R16.1 R17.2 R22.2 T1.1 U1.9 U1.24 U1.36 U1.48 U2.1 U3.3 U3.7 U3.8 U4.8 U6.3 U7.3 U7.7 U7.8 U8.11 | length 7420
  Top Layer w10: T1.1 2358,2231.5 2381,2208.5 2381,2131.46 C10.2 U2.1@2378.54,2024.84 ; U2.1@2381.19,2025.8 U2.1@2380.23,2024.84 ; v1(2513,1974) 2462.16,2024.84 U2.1@2380.23,2024.84 ; v1(2594,2270) 2595,2271 2891.54,2271 C2.2 2898.46,2269 2904.09,2263.37 2904.09,2258.43 2908.91,2253.62 2908.91,2253.4 2915.94,2246.37 2916.17,2246.37 2941.73,2220.81 U1.36 ; C1.2 2698.38,1769 2755.11,1825.73 U1.48 ; U1.9 3099.21,1641.95 3117.16,1624 C3.2 3127,1624 3132.63,1629.63 3132.63,1634.79 3185.85,1688 v1(3221,1688) v1(3280,1688) ; U1.24 3313.27,2042.27 3356.46,2085.46 C4.2 ; J2.1 3416,2835.83 v1(3416,2722) ; U2.1@2378.54,2024.84 U2.1 U2.1@2380.23,2024.84 ; U2.1@2378.54,2024.84 U2.1@2380.23,2024.84
  Top Layer w15: v1(1040.25,598.89) 796.14,843 181,843 130,894 130,2491 301,2662 1259,2662 1709,2212 1846,2212 1931,2127 2376.54,2127 C10.2 ; v1(2546,1726) 2684.92,1726 2693.46,1734.54 C1.2 ; C4.2 3385,2156.71 3393.79,2165.5 3549.5,2165.5 3575,2140 U3.3
  other v1: 3599,395 3659,395 3718,395 3599,447 3659,447 3718,447 3599,499 3659,499 3718,499 3599,552 3659,552 3718,552 1093.25,598.89 1145.25,598.89 1197.25,598.89 1252.25,599.89 1305.25,599.89 2858,875 2917,875 2858,927 2917,927 2858,979 2917,979 2858,1032 2917,1032 3594,1383 3654,1383 3713,1383 3594,1435 3654,1435 3713,1435 3594,1487 3654,1487 3713,1487 3594,1540 3654,1540 3713,1540 3568,1910 3621,1910 3673,1910 3568,1969 3621,1969 3673,1969 4363,2362 4422,2362 4363,2415 4422,2415 4363,2467 4422,2467 2879,2672 2931,2672 2984,2672 2879,2732 2931,2732 2984,2732 3095,2751 3716,2770 3775,2770
VCC_5V: C15.2 C16.2 C19.2 C20.2 C21.2 C22.2 C30.2 C36.2 D1.1 D2.1 D3.1 FU1.1 J8.1 R7.2 R8.2 R9.2 RB5.1 U5.6 U6.2 U8.12 USB1.1 | length 6188.7
  Top Layer w18: 3438.82,148.18 USB1.1
  Top Layer w20: U5.6 2555,666 2611,610 2631,610 2690.97,550.03 2690.97,533.47 2690.63,533.13 2690.63,521.09 C30.2 ; 2740,489 2740,395 2813,322 3427.82,322 3439.54,310.28 USB1.1@3439.54,257.57
  Top Layer w21: 3438.82,148.18 3524,63 3680,63 3864,247 3864,842.7 3851.7,855 3766.53,855 3738.59,827.06 3738.59,814.13 3738.46,814 C36.2 U8.12
  Top Layer w25: FU1.1 1009.98,395.02 v1(1240,165) v1(1293,165) v1(1345,165) v1(1397,165) 1397.5,165.5 1451.5,165.5 v1(1452,166) v1(1505,166) ; C20.2 2631.36,466.44 2646,481.08 2646,502.76 2660.64,517.41 2688.13,517.41 C30.2@2690,519.28 ; C30.2 C30.2@2690,519.28 ; 2740,489 2711.59,517.41 2691.87,517.41 C30.2@2690,519.28
  Top Layer w30: U6.2 1370.99,458.99 1420,508 1449,508 C15.2@1457,500 ; C15.2 1584.72,501.92 1586.18,500.46 C16.2 ; C19.2 2548.46,477.54 2559.56,466.44 C20.2
  Top Layer w40: J8.1 1619,269.22 1619,199.43 1642.43,176 2652.57,176 2676,199.43 2676,385.44 C20.2
  Top Layer w50: FU1.1 U6.2 1201.61,330.39 1250,282 1581,282 1583,284
  other v1: 1735,1301 1735,1354 1983,1396 1735,1406 1983,1449 1735,1458 1983,1505 1734,1513 1983,1558 1734,1566 1983,1610 1734,1622 1734,1675 1734,1727 1734,1779 1733,1834 1733,1887
VREF: C25.2 U5.8 | length 251.6
  Top Layer w20: U5.8 2655.77,693.23 2655.77,624.23 2757.73,522.27 C25.2
W25Q64_CLK: U1.15 U3.6 | length 462
  Top Layer w10: U1.15 3389.9,1865.1 3532,1723 3569.14,1723 3575,1728.86 U3.6@3575,1771.91
W25Q64_CS: U1.14 U3.1 | length 1097.4
  Top Layer w10: U1.14 3377.58,1845.42 3520,1703 3748,1703 3810,1765 3810,2030 3767,2073 3680.46,2073 U3.1
W25Q64_MISO: U1.16 U3.2 | length 770.4
  Top Layer w10: U1.16 3424.21,1884.79 v2(3460,1849) ; U3.2 v2(3625,2186)
  Bottom Layer w10: v2(3460,1849) 3460,1896 3492,1928 3492,2053 v2(3625,2186)
W25Q64_MOSI: U1.17 U3.5 | length 367.3
  Top Layer w10: U1.17 3447.7,1904.47 3518.54,1833.62 3525,1827.17 U3.5
pads on no net: H1.1 H2.1 H3.1 K1.2 K1.3 K2.2 K2.3 U1.1 U1.2 U1.3 U1.4 U1.10 U1.11 U1.18 U1.19 U1.20 U1.28 U1.29 U1.40 U1.44 U4.2 U4.4 U4.5 U4.6 U4.7 U4.9 U4.10 U4.11 U4.12 U4.13 U4.14 U4.19 U4.20 U5.12 U8.14 USB1.4
copper on no net: | length 775.2
  Top Layer w10: 2680.04,1905 2857.77,1905 2858.3,1904.47 2882.68,1904.47 ; 2733,1983 2733.21,1983.21 2882.68,1983.21 ; 3079.53,2101.32 3079.53,2125.7 3080,2126.17 3080,2432.64 ; 3099,2192.32 3099.21,2192.11 3099.21,2101.32

## Polygon pours and split planes (outlines as drawn)
GND on Top Layer "GND_L01_P032" (solid, pour order 32): 25,3038 4797,3038 4819,3016 4819,1986 4803,1970 4558,1970 4551,1963 4552,1962 4552,775 4558,769 4805,769 4817,757 4816,756 4816,23 4803,10 28,10 7,31 7,3020
VCC_5V on Top Layer "VCC_5V_L01_P023" (solid, pour order 23): 1683,1185 1757,1111 2260,1111 2273,1124 2351,1124 2358,1131 2358,1249.71 2338.71,1269 2120,1269 2074,1315 2074,1726.76 1925,1868.58 1925,2005 1885,2005 1726,2005 1683,1962
GND on Top Layer "GND_L01_P030" (solid, pour order 30): 1,3042
VCC_5V on Top Layer "VCC_5V_L01_P029" (solid, pour order 29): 1031,431
VCC_5V on Top Layer "VCC_5V_L01_P026" (solid, pour order 26): 2552,645
VCC_5V on Top Layer "VCC_5V_L01_P025" (solid, pour order 25): 2552,645
VCC_3V3 on Top Layer "VCC_3V3_L01_P017" (solid, pour order 17): 2890,2805 2931,2764 3003,2764 3017,2750 3017,2660 2998,2641 2870,2641 2837,2674 2837,2785 2857,2805
VCC_3V3 on Top Layer "VCC_3V3_L01_P016" (solid, pour order 16): 3699,2670 3699,2875 3703,2879 3726,2879 3803,2802 3803,2748 3721,2666 3720,2666 3720,2662 3719,2661 3700,2661
VCC_3V3 on Top Layer "VCC_3V3_L01_P015" (solid, pour order 15): 1089,637 1090,638 1390,638 1421,607 1649,607 1674,632 1731,632 1731,590 1706,565 1397,565 1339,507 1084,507 1076,515 1076,625 1089,638
VCC_3V3 on Top Layer "VCC_3V3_L01_P014" (solid, pour order 14): 3865.37,1749.87 3709,1593.5 3584,1593.5 3570,1579.5 3570,1356.5 3718,1208.5 3718,1026.5 3848,896.5 3890,854.5 3890,764.5 3898,756.5 4161,756.5 4165,756.5 4221,805.5 4221,865.5 4253,865.5 4253,890.5 4251,892.5 4181,892.5 4077.72,821.08 3936,821.08 3936,894.5 3790,1040.5 3790,1568.5 3859,1637.5 3961,1637.5 3961,1793.5 3921.96,1832.54 3865.37,1832.54
VCC_3V3 on Top Layer "VCC_3V3_L01_P013" (solid, pour order 13): 4324,2479 4338,2493 4440,2493 4463,2470 4463,2443 4471,2435 4560,2435 4560,2404 4474,2404 4464,2394 4464,2289 4489,2264 4489,2110 4486,2107 4464,2107 4460,2111 4460,2255 4441,2274 4340,2274 4324,2290
VCC_3V3 on Top Layer "VCC_3V3_L01_P012" (solid, pour order 12): 3563,2073 3563,2011 3533,1981 3533,1886 3561,1858 3596,1858 3596,1716 3740,1716 3794,1773.52 3794,1820 3782,1832 3733,1832 3707,1858 3707,1994 3686,2015 3592,2015 3586,2021 3586,2061 3576,2061 3564,2073
VCC_3V3 on Top Layer "VCC_3V3_L01_P009" (solid, pour order 9): 2861,1144 2893,1176 3028,1176 3044,1160 3044,1084 2952,992 2952,780 2987,745 3042,745 3077,780 3077,823 3092,823 3094,821 3094,667 3026,599 3026,563 3025,564 2989,564 2914,639 2914,734 2828,820 2828,1059 2860,1091 2860,1144 2861,1145
VCC_3V3 on Top Layer "VCC_3V3_L01_P007" (solid, pour order 7): 3721,775 3749,747 3749,371 3741,363 3582,363 3572,373 3572,574 3603,605 3665,605 3665,752 3613,752 3613,773 3615,775
MUTE on Top Layer "MUTE_L01_P002" (solid, pour order 2): 2495,664 2495,644 2475,624 2475,539 2495,519 2610,519 2625,534 2625,564 2570,619 2540,619 2515,644 2515,664
NetFU1_2 on Top Layer "NETFU1_2_L01_P001" (solid, pour order 1): 620,579 655,614 920,614 945,589 945,324 880,259 645,259 620,284
5VA on Top Layer "5VA_L01_P000" (solid, pour order 0): 1865,1074 2060,1074 2085,1049 2295,1049 2305,1059 2305,1084 2315,1094 2530,1094 2540,1084 2540,1004 2510,974 2480,974 2470,964 2470,889 2460,879 2445,879 2440,884 2440,959 2425,974 1895,974 1865,1004
GND on Bottom Layer "GND_L02_P033" (solid, pour order 33): 24,3039 4816,3039 4821,3034 4821,1976 4814,1969 4563,1969 4552,1958 4552,780 4560,772 4812,772 4818,766 4818,9 4813,4 12,4 4,12 4,3019
VCC_3V3 on Bottom Layer "VCC_3V3_L02_P019" (solid, pour order 19): 1018,629 2771,629 2829,687 2829,940 2828,941 2828,1252 2490,1590 2490,2413 2880,2803 3817,2803 3932,2688 4359,2688 4462,2585 4462,2306 4443,2287 4338,2287 4324,2301 4324,2580 4321,2580 4280,2621 4279,2620 3921,2620 3888,2587 3888,2228 3887,2228 3705,2046 3705,1612 3770,1547 3770,393 3733,356 3579,356 3568,367 3568,571 3608,611 3686,611 3708,633 3708,1329 3693,1344 3566,1344 3541,1369 3541,2022 3772,2253 3772,2634 3750,2656 3015,2656 2993,2634 2860,2634 2630,2404 2630,1592 2957,1265 2957,685 2849,577 2850,577 2851,576 2831,556 1023,556 1010,569 1010,628 1015,628 1010,623 1010,621
VCC_5V on Bottom Layer "VCC_5V_L02_P028" (solid, pour order 28): 1716,1946 1852,1946 2031,1767 2031,1296 1962,1227 295,1227 212.5,1129 212.5,622 212.5,684.5 292,605 873,605 1027,451 1511,451 1652,310 1652,197 1543,88 1166,88 1139,115 1139,282 1061,360 897,360 772,485 253,485 130,599 126,604 126,1172 268,1314 1584,1314 1666,1396 1666,1896
no net on Bottom Layer "NONET_L02_P027" (solid, pour order 27): 1651,1996
VCC_3V3 on Bottom Layer "VCC_3V3_L02_P021" (solid, pour order 21): 3608,643
VCC_3V3 on Bottom Layer "VCC_3V3_L02_P020" (solid, pour order 20): 3295,1715 3309,1701 3309,1436 3608,1137 3608,611 3568,562 3568,1128 3276,1420 3276,1648 3259,1665 3209,1665 3195,1679 3195,1709 3201,1715

## Silkscreen, mask and mechanical layers (free items; w line width, h text height)
Top Overlay:
  circle w10: c4400,204 r110.94
  text "set_mqtt_firmware" at 4536.77,3009 h55 r270
  text "develop_mode" at 3910,2980.66 h60
  text "Expand_relay" at 805,2947.51 h40
  text "GND" at 3354.67,2778 h60 r270
  text "RX" at 3250,2775 h60 r270
  text "TX" at 3306,2775 h60 r270
  text "3V3" at 3405.67,2775 h60 r270
  text "CLK" at 2707.67,2769 h60 r270
  text "DIO" at 2758.67,2769 h60 r270
  text "GND" at 2810.67,2769 h60 r270
  text "3V3" at 2860.67,2769 h60 r270
  text "RESET" at 4010,2631.67 h60
  text "RX" at 4407.62,2544 h60
  text "www.meseee.com" at 2512,2519.73 h170
  text "TX" at 4404.62,2495 h60
  text "GND" at 4361,2450.67 h60
  text "Self_service_system_V2" at 2706,2432.91 h90
  text "3V3" at 4383,2397.67 h60
  text "2024_8_27" at 2936.93,2342.21 h80
  text "Download" at 4264,2026.61 h60
  text "Normal" at 3859,2024.61 h60
  text "Normal" at 3805,570.61 h60
  text "Download" at 4576,566.61 h60
  text "DC5V" at 30.78,419 h65 r270
  text "SPK2" at 2485,136.44 h40
  text "SPK1" at 2055,133.44 h40
  text "expand_5V" at 1593,131.1 h40
Mechanical 1:
  lines w7: 0,-1 4825,-1 4825,779 4565,779 4560,784 4560,1049 4560,1694 4560,1959 4565,1964 4825,1964 4825,3044 0,3044 0,-1
  lines w10: 700.67,2612.63 cw(c761,2539) 816.73,2461.83 cw(c805,2476) 798.07,2493.04 ; 701.55,2611.55 ccw(c710,2596) 722.6,2583.57 cw(c761,2539) 797.99,2493.25 ; 1158.99,878.4 ccw(c1160,851) 1163.23,823.77 ; 1158.99,1558.4 ccw(c1160,1531) 1163.23,1503.77 ; 1158.99,2237.18 ccw(c1160,2209.78) 1163.23,2182.55 ; 1159.19,878.42 1314.96,878.42 ccw(c1320.06,944) 1319.99,1009.77 1164.23,1009.77 cw(c1161,1037) 1159.99,1064.4 ; 1159.19,1558.42 1314.96,1558.42 ccw(c1320.06,1624) 1319.99,1689.77 1164.23,1689.77 cw(c1161,1717) 1159.99,1744.4 ; 1159.19,2237.2 1314.96,2237.2 ccw(c1320.06,2302.78) 1319.99,2368.55 1164.23,2368.55 cw(c1161,2395.78) 1159.99,2423.18 ; 1159.99,1064 1175,1064 1335,1064 ; 1159.99,1744 1175,1744 1335,1744 ; 1159.99,2422.78 1175,2422.78 1335,2422.78 ; 1163.23,824.2 1320,824.2 ; 1163.23,1504.2 1320,1504.2 ; 1163.23,2182.98 1320,2182.98 ; 1320,823.79 ccw(c1320.06,944) 1334.91,1063.29 ; 1320,1503.79 ccw(c1320.06,1624) 1334.91,1743.29 ; 1320,2182.57 ccw(c1320.06,2302.78) 1334.91,2422.07

## Text inside footprints (layer, text, board x,y; h text height)
X1: Top Overlay "NC" at 30.72,2159 h65 r270; Top Overlay "NO" at 30.78,2564 h65 r270; Top Overlay "COM" at 30.78,2384 h65 r270
X2: Top Overlay "NC" at 30.72,1479 h65 r270; Top Overlay "NO" at 30.78,1884 h65 r270; Top Overlay "COM" at 30.78,1704 h65 r270
X3: Top Overlay "NC" at 30.72,799 h65 r270; Top Overlay "NO" at 30.78,1204 h65 r270; Top Overlay "COM" at 30.78,1024 h65 r270